# EAGLE board Board-TSC (EAGLE 9.7.0)
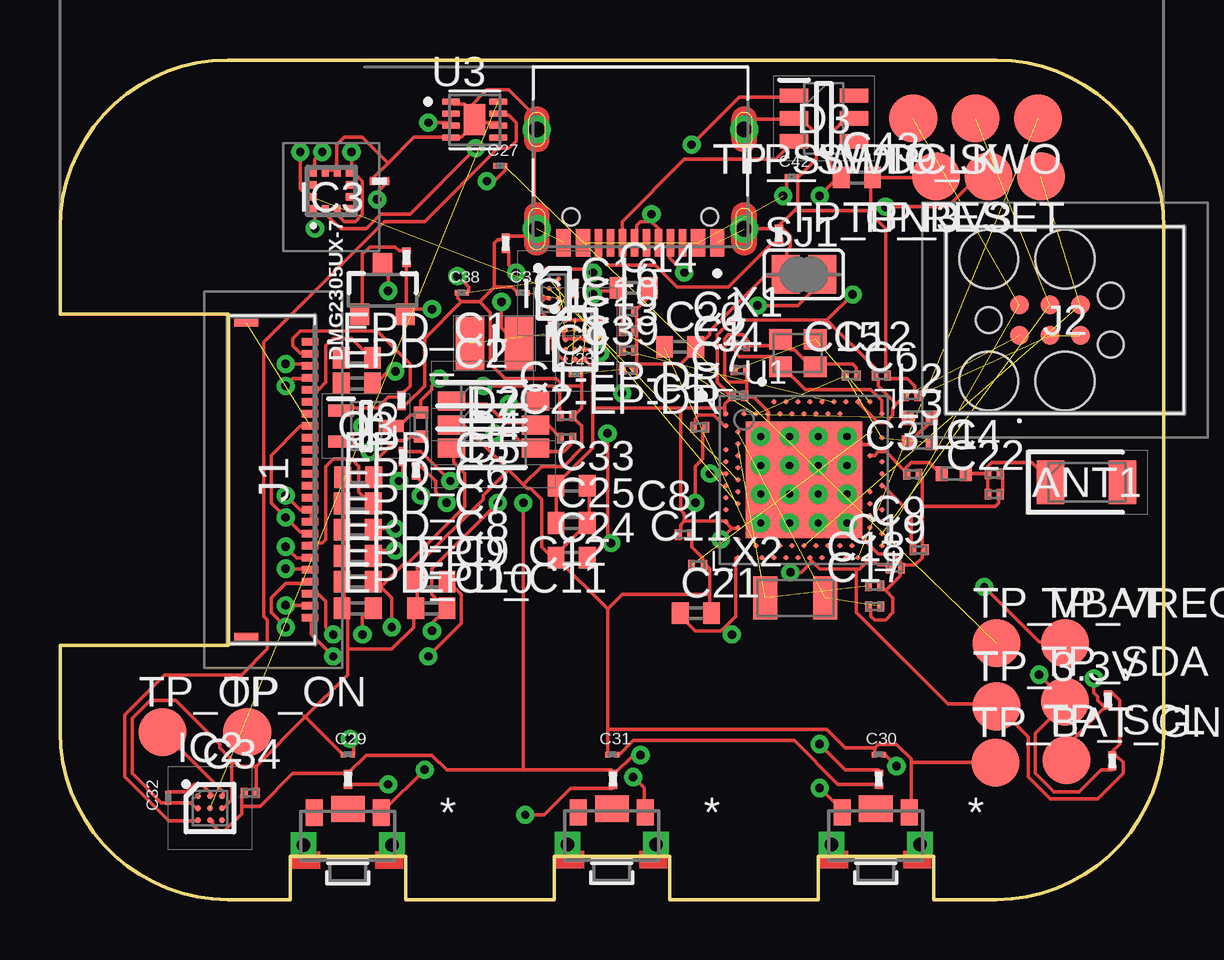
[diagram p0: board, top side]
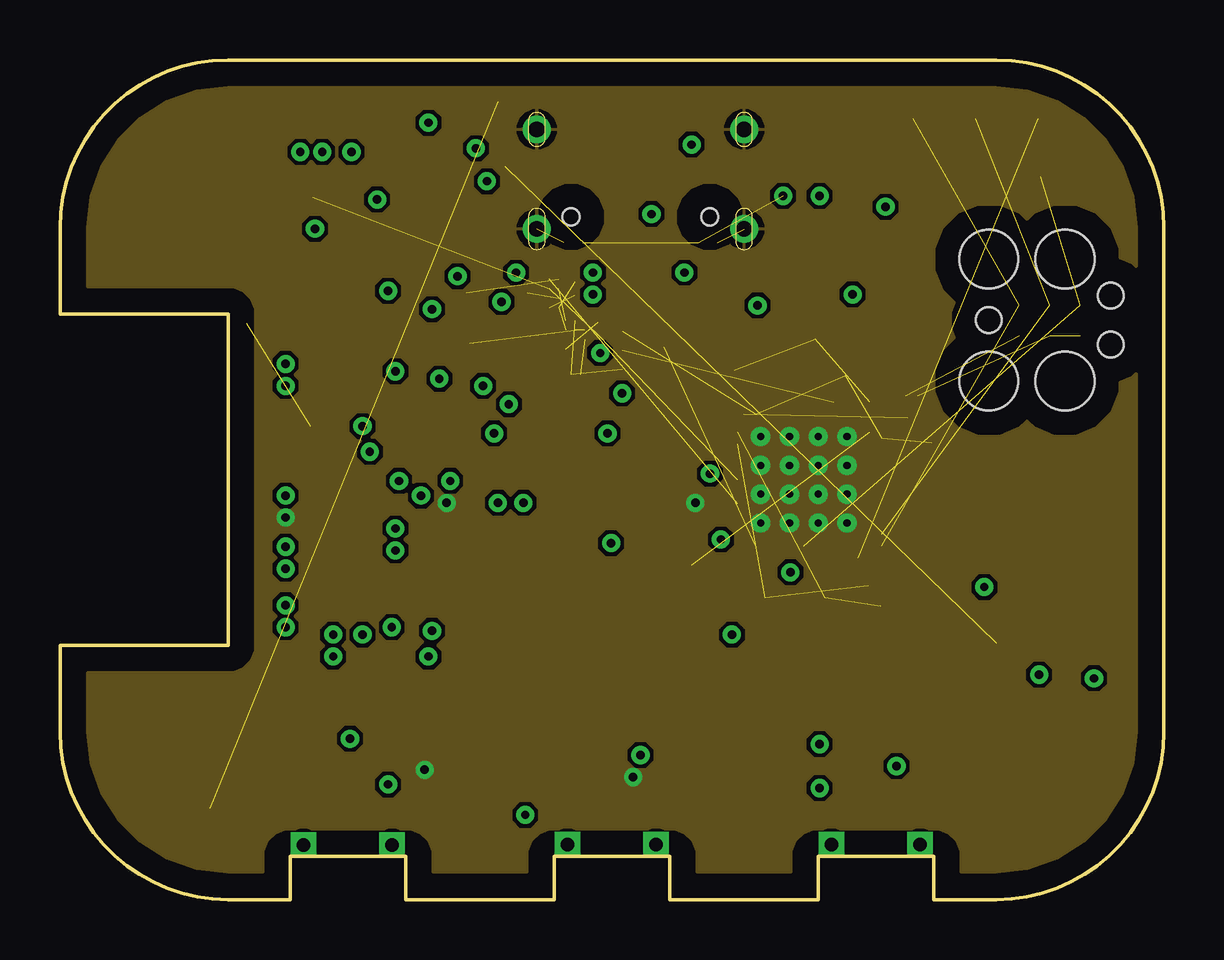
[diagram p1: board, inner layer Route2]
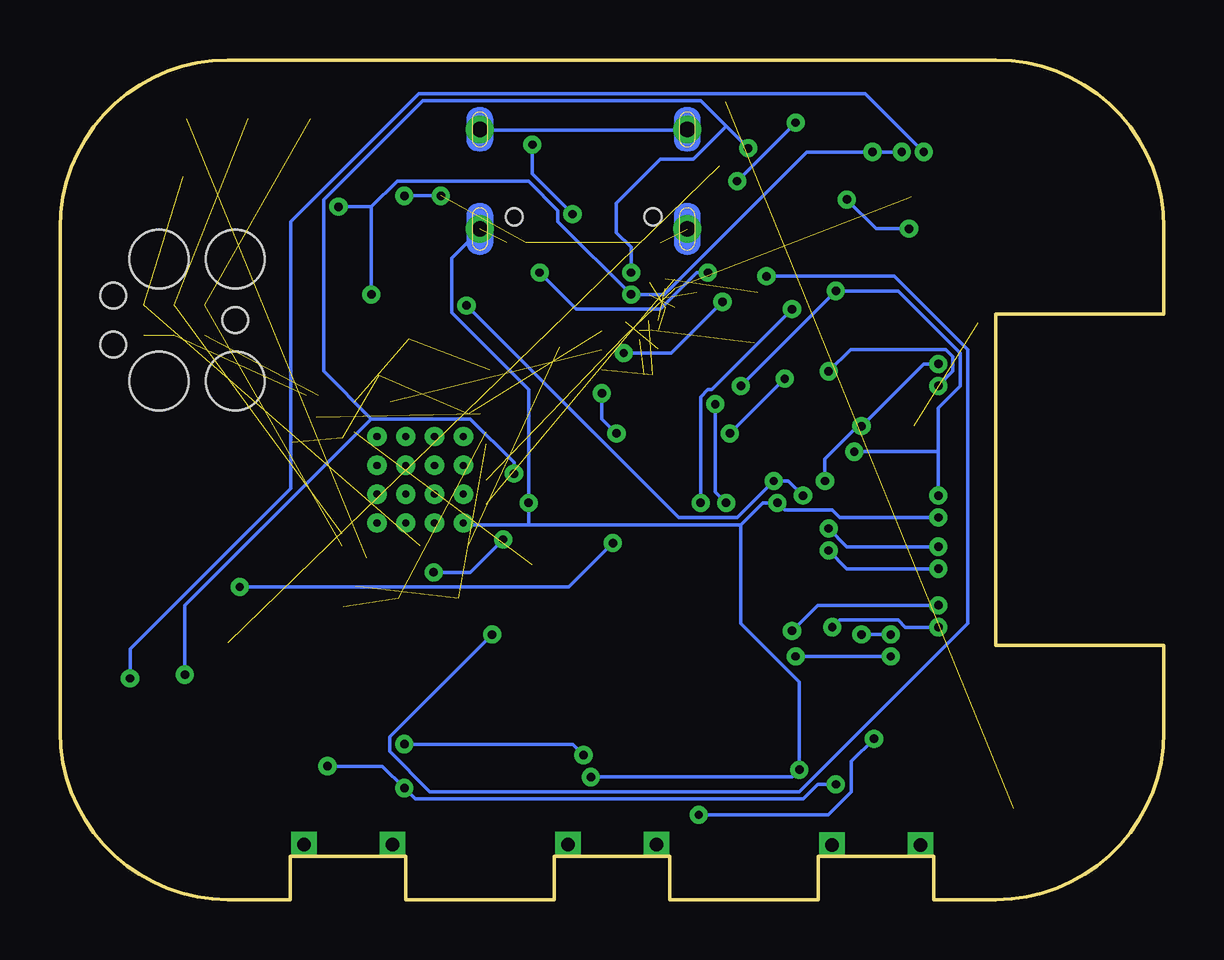
[diagram p2: board, bottom side, seen from below]

Size 46 x 35 mm. Coordinates in mm from the lower left corner, seen from the top.
Outline: 39,0 36.4,0 36.4,1.8 31.6,1.8 31.6,0 25.4,0 25.4,1.8 20.6,1.8 20.6,0 14.4,0 14.4,1.8 9.6,1.8 9.6,0 7,0 arc-90 0,7 0,10.6 7,10.6 7,24.4 0,24.4 0,28 arc-90 7,35 39,35 arc-90 46,28 46,7 arc-90 39,0
Copper layers (1+2*15+16): Top / Route2 / Route63 / Bottom
Stack-up 4 Layer Stack: Top SilkScreen Epoxy Ink / Top SolderMask SR:Green 0.0254mm Dk 4.3 / Top Surface Finish Lead-Free 0.02mm / Top CuFoil:007 0.035mm / Dielectric-1 Prepreg:001 0.064mm / Dielectric-2 Prepreg:001 0.064mm / Route2 CuFoil:007 0.035mm / Dielectric-3 Core:066 0.711mm / Route63 CuFoil:007 0.035mm / Dielectric-4 Prepreg:001 0.064mm / Dielectric-5 Prepreg:001 0.064mm / Bottom CuFoil:007 0.035mm / Bottom Surface Finish Lead-Free 0.02mm / Bottom SolderMask SR:Green 0.0254mm Dk 4.3 / Bottom SilkScreen Epoxy Ink
Design rules: minimum copper width 6mil, minimum drill size 0.35mm, copper clearance wire_polygon to wire_polygon 6mil, copper clearance wire_polygon to pad_smd 6mil, copper clearance wire_polygon to via 6mil, copper clearance pad_smd to pad_smd 6mil, copper clearance pad_smd to via 6mil, copper clearance via to via 6mil, copper clearance smd to pad (same net) 6mil, copper clearance smd to via (same net) 6mil, copper clearance smd to smd (same net) 6mil, dimension clearance 40mil, via restrict clearance 0mil, restrict clearance 0mil, drill distance 6mil, keepout clearance 0mil

## Footprints (pad centres in the part's own frame; a part is rotated, then mirrored left to right if it is on the bottom)
2450AT18B100E_ANTC3216X140N = smd 1.15 x 1.8: 1 -1.5,0; 2 1.5,0
NORDIC_NRF_3_RESC0201_L = smd 0.28 x 0.43: 1 -0.255,0; 2 0.255,0
ESP32_C6_LIBRARY_1_ESP32_WROVER_EAGLE-LTSPICE_C0402 = smd 0.7 x 0.9: 1 -0.65,0; 2 0.65,0
GRM011R60J152KE01L_2_CAPC0201X13N = smd 0.22 x 0.23: 1 -0.185,0; 2 0.185,0
ESP32_C6_LIBRARY_5_SOD3716X135N = smd 1.15 x 0.8: 1 -1.75,0; 2 1.75,0
ESP32_C6_LIBRARY_3_SOT95P280X145-6N = smd 1.2 x 0.6: 1 -1.25,0.95; 2 -1.25,0; 3 -1.25,-0.95; 4 1.25,-0.95; 5 1.25,0; 6 1.25,0.95
ESP32_C6_LIBRARY_4_ESP32_C6_LIBRARY_4_ESP32_C6_LIBRARY_4_ESP32_C6_LIBRARY_4_ESP32_WROVER_SPARKFUN-DISCRETESEMI_SOT23-3 = smd 0.8 x 0.9: 1 -0.95,-1; 2 0.95,-1; 3 0,1.1
BQ25180YBGR_BGA8C40P2X4_100X155X50 = smd 0.2 x 0.2: A1 -0.2,0.6; A2 0.2,0.6; B1 -0.2,0.2; B2 0.2,0.2; C1 -0.2,-0.2; C2 0.2,-0.2; D1 -0.2,-0.6; D2 0.2,-0.6
DRV2605YZFR_BGA9C50P3X3_144X144X62 = smd 0.25 x 0.25: A1 -0.5,0.5; A2 0,0.5; A3 0.5,0.5; B1 -0.5,0; B2 0,0; B3 0.5,0; C1 -0.5,-0.5; C2 0,-0.5; C3 0.5,-0.5
BMA423_BMA423 = smd 0.3 x 0.35: 1 -0.75,-0.775; 2 -0.25,-0.775; 3 0.25,-0.775; 4 0.75,-0.775; 7 0.75,0.775; 8 0.25,0.775; 9 -0.25,0.775; 10 -0.75,0.775 | smd 0.35 x 0.3: 5 0.775,-0.25; 6 0.775,0.25; 11 -0.775,0.25; 12 -0.775,-0.25
RT6160AWSC_BGA15C40P3X5_140X230X60 = smd 0.216 x 0.216: A1 -0.4,0.8; A2 0,0.8; A3 0.4,0.8; B1 -0.4,0.4; B2 0,0.4; B3 0.4,0.4; C1 -0.4,0; C2 0,0; C3 0.4,0; D1 -0.4,-0.4; D2 0,-0.4; D3 0.4,-0.4; E1 -0.4,-0.8; E2 0,-0.8; E3 0.4,-0.8
503480-2400_5034802400 = smd 0.3 x 0.7: 1 -5.75,1.525; 2 -5.25,1.525; 3 -4.75,1.525; 4 -4.25,1.525; 5 -3.75,1.525; 6 -3.25,1.525; 7 -2.75,1.525; 8 -2.25,1.525; 9 -1.75,1.525; 10 -1.25,1.525; 11 -0.75,1.525; 12 -0.25,1.525; 13 0.25,1.525; 14 0.75,1.525; 15 1.25,1.525; 16 1.75,1.525; 17 2.25,1.525; 18 2.75,1.525; 19 3.25,1.525; 20 3.75,1.525; 21 4.25,1.525; 22 4.75,1.525; 23 5.25,1.525; 24 5.75,1.525 | smd 0.3 x 1: MP1 -6.54,-1.125; MP2 6.54,-1.125
TC2030-IDC_TC2030IDC = smd 0.783 x 0.783: 1 -0.953,-0.635; 2 -0.953,0.635; 3 0.317,-0.635; 4 0.317,0.635; 5 1.588,-0.635; 6 1.588,0.635 | hole 2.451: -2.223,-2.54; -2.223,2.54; 0.952,-2.54; 0.952,2.54 | hole 1.067: -2.223,0; 2.857,-1.016; 2.857,1.016
KH-TYPE-C-16P_KINGHELM_KH-TYPE-C-16P = smd 0.6 x 1.15: A1_B12 -3.2,4.725; A4_B9 -2.4,4.725; A9_B4 2.4,4.725; A12_B1 3.2,4.725 | smd 0.3 x 1.15: A5 -1.25,4.725; A6 -0.25,4.725; A7 0.25,4.725; A8 1.25,4.725; B5 1.75,4.725; B6 0.75,4.725; B7 -0.75,4.725; B8 -1.75,4.725 | drill 0.65 pad 1.05: SH1 -4.32,0; SH2 4.32,0; SH3 -4.32,4.15; SH4 4.32,4.15 | hole 0.7: -2.89,3.65; 2.89,3.65
NORDIC_NRF_2_RESC0402_L = smd 0.5 x 0.6: 1 -0.5,0; 2 0.5,0
MLP2016SR47MT0S1_INDC2016X100N = smd 1.2 x 2.2: 1 -1.028,0; 2 1.028,0
ESP32_C6_LIBRARY_6_SOT65P210X110-3N = smd 1.05 x 0.5: 1 -1.05,0.65; 2 -1.05,-0.65; 3 1.05,0
ERA-1AEB3401C_0201 = smd 0.35 x 0.25: 1 0,0.275; 2 0,-0.275
CPF0201D7K68C1_0201 = smd 0.35 x 0.25: 1 0,0.275; 2 0,-0.275
ESP32_C6_LIBRARY_7_JUMPER_SJ = smd 1.168 x 1.6: 1 -0.762,0; 2 0.762,0
2025-10-22_07-23-44_LIBRARY_SW_EVP-AKE31A_PAN = smd 0.711 x 1.092: 1 -1.4,-0.972; 2 1.4,-0.972 | drill 0.559 pad 0.914 square: 3 -1.848,0.381; 4 1.848,0.381 | smd 1.397 x 1.092: 5 0,-1.124
HECTOR_WATCH_1_TP20R = smd 2 x 2: TP 0,0
NORDIC_NRF_4_AQFN50P700X700X85_HS-74N = smd 4.85 x 4.85: P$74 0,0 | drill 0.3 pad 0.6: P$75 -1.8,1.8; P$76 -0.6,1.8; P$77 0.6,1.8; P$78 1.8,1.8; P$79 -1.8,0.6; P$80 -0.6,0.6; P$81 0.6,0.6; P$82 1.8,0.6; P$83 -1.8,-0.6; P$84 -0.6,-0.6; P$85 0.6,-0.6; P$86 1.8,-0.6; P$87 -1.8,-1.8; P$88 -0.6,-1.8; P$89 0.6,-1.8; P$90 1.8,-1.8 | smd 0.2 x 0.2: P$A8 -1.25,3.25; P$A10 -0.75,3.25; P$A12 -0.25,3.25; P$A14 0.25,3.25; P$A16 0.75,3.25; P$A18 1.25,3.25; P$A20 1.75,3.25; P$A22 2.25,3.25; P$A23 2.75,3.25; P$AA24 3.25,-2.25; P$AB2 -2.75,-2.5; P$AC5 -2,-2.75; P$AC9 -1,-2.75; P$AC11 -0.5,-2.75; P$AC13 0,-2.75; P$AC15 0.5,-2.75; P$AC17 1,-2.75; P$AC19 1.5,-2.75; P$AC21 2,-2.75; P$AC24 3.25,-2.75; P$AD2 -2.75,-3.25; P$AD4 -2.25,-3.25; P$AD6 -1.75,-3.25; P$AD8 -1.25,-3.25; P$AD10 -0.75,-3.25; P$AD12 -0.25,-3.25; P$AD14 0.25,-3.25; P$AD16 0.75,-3.25; P$AD18 1.25,-3.25; P$AD20 1.75,-3.25; P$AD22 2.25,-3.25; P$AD23 2.75,-3.25; P$B1 -3.25,2.75; P$B3 -2.5,2.75; P$B5 -2,2.75; P$B7 -1.5,2.75; P$B9 -1,2.75; P$B11 -0.5,2.75; P$B13 0,2.75; P$B15 0.5,2.75; P$B17 1,2.75; P$B19 1.5,2.75; P$B24 3.25,2.75; P$C1 -3.25,2.25; P$D2 -2.75,2; P$D23 2.75,2; P$E24 3.25,1.75; P$F2 -2.75,1.5; P$F23 2.75,1.5; P$G1 -3.25,1.25; P$H2 -2.75,1; P$H23 2.75,1; P$J1 -3.25,0.75; P$J24 3.25,0.75; P$K2 -2.75,0.5; P$L1 -3.25,0.25; P$L24 3.25,0.25; P$M2 -2.75,0; P$N1 -3.25,-0.25; P$N24 3.25,-0.25; P$P2 -2.75,-0.5; P$P23 2.75,-0.5; P$R1 -3.25,-0.75; P$R24 3.25,-0.75; P$T2 -2.75,-1; P$T23 2.75,-1; P$U1 -3.25,-1.25; P$U24 3.25,-1.25; P$V23 2.75,-1.5; P$W1 -3.25,-1.75; P$W24 3.25,-1.75; P$Y2 -2.75,-2; P$Y23 2.75,-2
ESP32_C6_LIBRARY_SON50P200X200X80-9N = smd 0.76 x 0.27: 1 -0.985,0.75; 2 -0.985,0.25; 3 -0.985,-0.25; 4 -0.985,-0.75; 5 0.985,-0.75; 6 0.985,-0.25; 7 0.985,0.25; 8 0.985,0.75 | smd 0.9 x 1.3: 9 0,0
NORDIC_NRF_BT-XTAL_2016_N = smd 0.95 x 0.85: 1 -0.725,-0.575; 2 0.725,-0.575; 3 0.725,0.575; 4 -0.725,0.575
NORDIC_NRF_1_XTAL_3215_N = smd 1 x 1.8: 1 -1.25,0; 2 1.25,0

## Placement (x,y rotation side)
ANT1  2450AT18B100E  [2450AT18B100E_ANTC3216X140N]  42.78,17.4 0 top
C1  12pF  [NORDIC_NRF_3_RESC0201_L]  28.35,23.09 0 top
C1-EP-DR  10uF  [NORDIC_NRF_3_RESC0201_L]  21.11,20.17 0 top
C2  12pF  [NORDIC_NRF_3_RESC0201_L]  28.35,22.07 0 top
C2-EP-DR  4.7uF/25V  [NORDIC_NRF_3_RESC0201_L]  21.11,19.23 0 top
C3  1pF  [NORDIC_NRF_3_RESC0201_L]  35.54,17.73 0 top
C4  1pF  [NORDIC_NRF_3_RESC0201_L]  38.92,17.75 0 top
C5  100nF  [NORDIC_NRF_3_RESC0201_L]  26.65,19.68 0 top
C6  4.7µF  [NORDIC_NRF_3_RESC0201_L]  35.49,21.01 0 top
C7  100nF  [NORDIC_NRF_3_RESC0201_L]  28.28,21.01 0 top
C8  100nF  [NORDIC_NRF_3_RESC0201_L]  26.01,15.21 0 top
C9  820pF  [NORDIC_NRF_3_RESC0201_L]  35.79,14.58 0 top
C10  N.C.  [NORDIC_NRF_3_RESC0201_L]  23.68,23.71 0 top
C11  100pF  [NORDIC_NRF_3_RESC0201_L]  26.57,13.94 0 top
C12  100nF  [NORDIC_NRF_3_RESC0201_L]  34.22,21.84 0 top
C13  N.C.  [NORDIC_NRF_3_RESC0201_L]  23.68,22.9 0 top
C14  4.7µF  [ESP32_C6_LIBRARY_1_ESP32_WROVER_EAGLE-LTSPICE_C0402]  23.91,25.5 0 top
C15  1.0µF  [NORDIC_NRF_3_RESC0201_L]  32.97,21.84 0 top
C16  47nF  [NORDIC_NRF_3_RESC0201_L]  23.68,24.51 0 top
C17  12pF  [NORDIC_NRF_3_RESC0201_L]  33.94,12.22 0 top
C18  12pF  [NORDIC_NRF_3_RESC0201_L]  33.94,13.08 0 top
C19  100nF  [NORDIC_NRF_3_RESC0201_L]  34.8,13.82 0 top
C20  4.7µF  [ESP32_C6_LIBRARY_1_ESP32_WROVER_EAGLE-LTSPICE_C0402]  25.84,23.04 0 top
C21  4.7µF  [ESP32_C6_LIBRARY_1_ESP32_WROVER_EAGLE-LTSPICE_C0402]  26.5,11.94 0 top
C22  N.C.  [NORDIC_NRF_3_RESC0201_L]  38.92,16.89 0 top
C23  0.1uF  [GRM011R60J152KE01L_2_CAPC0201X13N]  21.49,21.89 0 top
C24  10uF  [ESP32_C6_LIBRARY_1_ESP32_WROVER_EAGLE-LTSPICE_C0402]  21.32,14.25 0 top
C25  22uF  [ESP32_C6_LIBRARY_1_ESP32_WROVER_EAGLE-LTSPICE_C0402]  21.32,15.7 0 top
C27  0.1uF  [GRM011R60J152KE01L_2_CAPC0201X13N]  18.34,30.58 0 top
C29  1uF  [GRM011R60J152KE01L_2_CAPC0201X13N]  11.99,6.05 0 top
C30  1uF  [GRM011R60J152KE01L_2_CAPC0201X13N]  34.12,6.05 0 top
C31  1uF  [GRM011R60J152KE01L_2_CAPC0201X13N]  23.02,6.05 0 top
C32  1uF  [GRM011R60J152KE01L_2_CAPC0201X13N]  4.5,4.24 90 top
C33  22uF  [ESP32_C6_LIBRARY_1_ESP32_WROVER_EAGLE-LTSPICE_C0402]  21.32,17.25 0 top
C34  0.1uF  [NORDIC_NRF_3_RESC0201_L]  7.93,4.44 0 top
C37  1uF  [GRM011R60J152KE01L_2_CAPC0201X13N]  19.28,25.3 0 top
C38  1uF  [GRM011R60J152KE01L_2_CAPC0201X13N]  16.74,25.3 0 top
C39  10uF  [NORDIC_NRF_3_RESC0201_L]  23.68,22.1 0 top
C42  0.1uF  [GRM011R60J152KE01L_2_CAPC0201X13N]  30.48,30.12 0 top
C43  4.7uF  [ESP32_C6_LIBRARY_1_ESP32_WROVER_EAGLE-LTSPICE_C0402]  33.2,30.1 0 top
D2  ESP32_C6_LIBRARY_5_MBR0530  [ESP32_C6_LIBRARY_5_SOD3716X135N]  18.06,20.78 0 top
D3  USBLC6-2SC6Y  [ESP32_C6_LIBRARY_3_SOT95P280X145-6N]  31.83,32.56 0 top
D4  ESP32_C6_LIBRARY_5_MBR0530  [ESP32_C6_LIBRARY_5_SOD3716X135N]  18.06,19.79 0 top
D5  ESP32_C6_LIBRARY_5_MBR0530  [ESP32_C6_LIBRARY_5_SOD3716X135N]  18.06,18.82 0 top
DMG2305UX-7  20V/4.2A/52mΩ/1.4W  [ESP32_C6_LIBRARY_4_ESP32_C6_LIBRARY_4_ESP32_C6_LIBRARY_4_ESP32_C6_LIBRARY_4_ESP32_WROVER_SPARKFUN-DISCRETESEMI_SOT23-3]  13.44,25.4 0 top
EPD_C1  1uF/50V  [ESP32_C6_LIBRARY_1_ESP32_WROVER_EAGLE-LTSPICE_C0402]  12.37,22.58 0 top
EPD_C2  1uF/50V  [ESP32_C6_LIBRARY_1_ESP32_WROVER_EAGLE-LTSPICE_C0402]  12.37,21.51 0 top
EPD_C5  0.1uF/50V  [ESP32_C6_LIBRARY_1_ESP32_WROVER_EAGLE-LTSPICE_C0402]  12.43,17.6 0 top
EPD_C6  1uF/50V  [ESP32_C6_LIBRARY_1_ESP32_WROVER_EAGLE-LTSPICE_C0402]  12.4,16.51 0 top
EPD_C7  1uF/50V  [ESP32_C6_LIBRARY_1_ESP32_WROVER_EAGLE-LTSPICE_C0402]  12.4,15.42 0 top
EPD_C8  1uF/50V  [ESP32_C6_LIBRARY_1_ESP32_WROVER_EAGLE-LTSPICE_C0402]  12.4,14.33 0 top
EPD_C9  1uF/50V  [ESP32_C6_LIBRARY_1_ESP32_WROVER_EAGLE-LTSPICE_C0402]  12.4,13.26 0 top
EPD_C10  1uF/50V  [ESP32_C6_LIBRARY_1_ESP32_WROVER_EAGLE-LTSPICE_C0402]  12.4,12.14 0 top
EPD_C11  1uF/50V  [ESP32_C6_LIBRARY_1_ESP32_WROVER_EAGLE-LTSPICE_C0402]  15.47,12.14 0 top
EPD_C12  1uF/50V  [ESP32_C6_LIBRARY_1_ESP32_WROVER_EAGLE-LTSPICE_C0402]  15.47,13.26 0 top
IC1  BQ25180YBGR  [BQ25180YBGR_BGA8C40P2X4_100X155X50]  20.58,25.27 0 top
IC2  DRV2605YZFR  [DRV2605YZFR_BGA9C50P3X3_144X144X62]  6.25,3.81 0 top
IC3  BMA421  [BMA423_BMA423]  11.31,29.54 0 top
IC9  RT6160AWSC  [RT6160AWSC_BGA15C40P3X5_140X230X60]  21.47,23.34 0 top
J1  503480-2400  [503480-2400_5034802400]  8.89,17.5 270 top
J2  TC2030-IDC  [TC2030-IDC_TC2030IDC]  40.92,24.15 0 top
J4  KH-TYPE-C-16P  [KH-TYPE-C-16P_KINGHELM_KH-TYPE-C-16P]  24.19,32.11 180 top
L1  3.9nH  [NORDIC_NRF_2_RESC0402_L]  37.24,17.75 0 top
L2  10µH  [NORDIC_NRF_2_RESC0402_L]  35.82,20.09 0 top
L3  15nH  [NORDIC_NRF_2_RESC0402_L]  35.82,19.05 0 top
L5  68uH  [NORDIC_NRF_2_RESC0402_L]  15.04,19.81 90 top
L7  FTC252012SR47MBCA  [MLP2016SR47MT0S1_INDC2016X100N]  18.11,23.19 0 top
Q3  SI1308EDL-T1-GE3  [ESP32_C6_LIBRARY_6_SOT65P210X110-3N]  12.76,19.74 0 top
R1_EP_DR  0.47  [ERA-1AEB3401C_0201]  14.28,18.47 0 top
R1_USB  5K1  [CPF0201D7K68C1_0201]  18.57,27.36 0 top
R2  0  [CPF0201D7K68C1_0201]  20.5,23.77 0 top
R2_EP_DR  10K  [ERA-1AEB3401C_0201]  14.23,20.8 180 top
R2_USB  5K1  [ERA-1AEB3401C_0201]  29.95,27.74 180 top
R3  0  [ERA-1AEB3401C_0201]  13.31,29.95 90 top
R4  0  [CPF0201D7K68C1_0201]  22.43,23.8 180 top
R5  10k  [CPF0201D7K68C1_0201]  11.99,5.02 180 top
R7  10k  [CPF0201D7K68C1_0201]  23.04,5.02 180 top
R8  10k  [CPF0201D7K68C1_0201]  34.12,5.02 180 top
R9  10K  [ERA-1AEB3401C_0201]  21.44,25.46 0 top
R17  3K3  [CPF0201D7K68C1_0201]  43.67,8.32 0 top
R18  3K3  [CPF0201D7K68C1_0201]  43.85,5.78 0 top
R_PWR_EPD  10K  [CPF0201D7K68C1_0201]  14.43,26.77 0 top
R_TYPE_SEL  2.2  [ERA-1AEB3401C_0201]  14.84,17.91 0 top
SJ1  [ESP32_C6_LIBRARY_7_JUMPER_SJ]  30.99,26.06 0 top
SW_DN  2025-10-22_07-23-44_LIBRARY_EVP-AKE31ASW_EVP-AKE31A_PAN  [2025-10-22_07-23-44_LIBRARY_SW_EVP-AKE31A_PAN]  11.99,2.66 180 top
SW_ENT  2025-10-22_07-23-44_LIBRARY_EVP-AKE31ASW_EVP-AKE31A_PAN  [2025-10-22_07-23-44_LIBRARY_SW_EVP-AKE31A_PAN]  22.99,2.67 180 top
SW_UP  2025-10-22_07-23-44_LIBRARY_EVP-AKE31ASW_EVP-AKE31A_PAN  [2025-10-22_07-23-44_LIBRARY_SW_EVP-AKE31A_PAN]  33.99,2.67 180 top
TP_3.3V  HECTOR_WATCH_1_TPTP20R  [HECTOR_WATCH_1_TP20R]  39.02,8.05 0 top
TP_3V3  HECTOR_WATCH_1_TPTP20R  [HECTOR_WATCH_1_TP20R]  38.69,30.14 180 top
TP_BAT_GND  HECTOR_WATCH_1_TPTP20R  [HECTOR_WATCH_1_TP20R]  38.98,5.71 0 top
TP_GND  HECTOR_WATCH_1_TPTP20R  [HECTOR_WATCH_1_TP20R]  36.5,30.14 180 top
TP_ON  HECTOR_WATCH_1_TPTP20R  [HECTOR_WATCH_1_TP20R]  7.8,6.98 0 top
TP_OP  HECTOR_WATCH_1_TPTP20R  [HECTOR_WATCH_1_TP20R]  4.27,6.98 0 top
TP_RESET  HECTOR_WATCH_1_TPTP20R  [HECTOR_WATCH_1_TP20R]  40.87,30.14 180 top
TP_SCL  HECTOR_WATCH_1_TPTP20R  [HECTOR_WATCH_1_TP20R]  41.94,5.82 0 top
TP_SDA  HECTOR_WATCH_1_TPTP20R  [HECTOR_WATCH_1_TP20R]  41.88,8.25 0 top
TP_SWDCLK  HECTOR_WATCH_1_TPTP20R  [HECTOR_WATCH_1_TP20R]  38.15,32.56 180 top
TP_SWDIO  HECTOR_WATCH_1_TPTP20R  [HECTOR_WATCH_1_TP20R]  35.55,32.56 180 top
TP_SWO  HECTOR_WATCH_1_TPTP20R  [HECTOR_WATCH_1_TP20R]  40.75,32.56 180 top
TP_VBAT  HECTOR_WATCH_1_TPTP20R  [HECTOR_WATCH_1_TP20R]  39.02,10.69 0 top
TP_VREG  HECTOR_WATCH_1_TPTP20R  [HECTOR_WATCH_1_TP20R]  41.88,10.69 0 top
U1  NRF52840_QF  [NORDIC_NRF_4_AQFN50P700X700X85_HS-74N]  30.99,17.5 0 top
U3  MAX17048G+T10  [ESP32_C6_LIBRARY_SON50P200X200X80-9N]  17.28,32.51 0 top
X1  32MHz  [NORDIC_NRF_BT-XTAL_2016_N]  30.74,22.78 0 top
X2  32.768kHz  [NORDIC_NRF_1_XTAL_3215_N]  30.64,12.57 0 top

## Library data of the parts
ANT1 = InkTime_v5 (1); ARROW_PART_NUMBER: 2450AT18B100E; ARROW_PRICE-STOCK: https://www.arrow.com/en/products/2450at18b100e/johanson-dielectrics?utm_currency=USD&region=nac; DESCRIPTION: Antennas 2.45GHz ANTENNA; HEIGHT: 1.4mm; MANUFACTURER_NAME: JOHANSON TECHNOLOGY; MANUFACTURER_PART_NUMBER: 2450AT18B100E; MOUSER_PART_NUMBER: 609-2450AT18B100E; MOUSER_PRICE-STOCK: https://www.mouser.co.uk/ProductDetail/Johanson-Technology/2450AT18B100E?qs=yCnrNFeXz%252Bh5MFsFIXGZGA%3D%3D
C1 C1-EP-DR C2 C2-EP-DR C3-C13 C15-C19 C22 C34 C39 L1-L3 L5 R1_EP_DR R1_USB R2 R2_EP_DR R2_USB R3-R5 R7-R9 R17 R18 R_PWR_EPD R_TYPE_SEL SJ1 TP_3.3V TP_3V3 TP_BAT_GND TP_GND TP_ON TP_OP TP_RESET TP_SCL TP_SDA TP_SWDCLK TP_SWDIO TP_SWO TP_VBAT TP_VREG U1 X1 X2 = InkTime_v5 (1)
C14 C20 C21 C24 C25 C33 C43 EPD_C1 EPD_C2 EPD_C5-EPD_C12 = InkTime_v5 (1); SPICEMODEL: NONE; SPICEPREFIX: C
C23 C27 C29-C32 C37 C38 C42 = InkTime_v5 (1); AVAILABILITY: In Stock; CHECK_PRICES: https://www.snapeda.com/parts/GRM011R60J152KE01L/Murata/view-part/?ref=eda; DESCRIPTION: SMD Capacitor X5R(EIA) with Capacitance: 1500pF Tol. 10%. Rated Voltage: 6.3Vdc; MF: Murata; MP: GRM011R60J152KE01L; PACKAGE: 0201 Murata; PRICE: None; SNAPEDA_LINK: https://www.snapeda.com/parts/GRM011R60J152KE01L/Murata/view-part/?ref=snap
D2 D4 D5 = InkTime_v5 (1); AVAILABILITY: In Stock; CHECK_PRICES: https://www.snapeda.com/parts/MBR0530/Onsemi/view-part/?ref=eda; DESCRIPTION: Diode Schottky 30 V 500mA Surface Mount SOD-123; MF: ON Semiconductor; MP: MBR0530; PACKAGE: SOD-123-2 ON Semiconductor; PRICE: None; PURCHASE-URL: https://www.snapeda.com/api/url_track_click_mouser/?unipart_id=179458&manufacturer=ON Semiconductor&part_name=MBR0530&search_term=None; SNAPEDA_LINK: https://www.snapeda.com/parts/MBR0530/Onsemi/view-part/?ref=snap
D3 = InkTime_v5 (1); AVAILABILITY: In Stock; CHECK_PRICES: https://www.snapeda.com/parts/USBLC6-2SC6Y/STMicroelectronics/view-part/?ref=eda; DESCRIPTION: 17V Clamp 5A (8/20µs) Ipp Tvs Diode Surface Mount SOT-23-6; MF: STMicroelectronics; MP: USBLC6-2SC6Y; PACKAGE: SOT-23-6 STMicroelectronics; PRICE: None; SNAPEDA_LINK: https://www.snapeda.com/parts/USBLC6-2SC6Y/STMicroelectronics/view-part/?ref=snap
DMG2305UX-7 = InkTime_v5 (1); PROD_ID: TRAN-14388
IC1 = InkTime_v5 (1); ARROW_PART_NUMBER: BQ25180YBGR; ARROW_PRICE-STOCK: https://www.arrow.com/en/products/bq25180ybgr/texas-instruments?utm_currency=USD&region=nac; DESCRIPTION: Charger IC Lithium Ion/Polymer, Lithium Iron Phosphate 8-DSBGA (1.6x1.1); HEIGHT: 0.5mm; MANUFACTURER_NAME: Texas Instruments; MANUFACTURER_PART_NUMBER: BQ25180YBGR; MOUSER_PART_NUMBER: 595-BQ25180YBGR; MOUSER_PRICE-STOCK: https://www.mouser.co.uk/ProductDetail/Texas-Instruments/BQ25180YBGR?qs=doiCPypUmgEWjAK%252BJAX6Tw%3D%3D
IC2 = InkTime_v5 (1); ARROW_PART_NUMBER: DRV2605YZFR; ARROW_PRICE-STOCK: https://www.arrow.com/en/products/drv2605yzfr/texas-instruments?region=nac; DESCRIPTION: Haptic Driver for ERM/LRA with Built-In Library and Smart Loop Architecture; HEIGHT: 0.625mm; MANUFACTURER_NAME: Texas Instruments; MANUFACTURER_PART_NUMBER: DRV2605YZFR
IC3 = InkTime_v5 (1); ARROW_PART_NUMBER: BMA423; ARROW_PRICE-STOCK: https://www.arrow.com/en/products/bma423/bosch; DESCRIPTION: Accelerometers Triaxial low-g 12bit Acceleration Sensor; HEIGHT: 1mm; MANUFACTURER_NAME: BOSCH; MANUFACTURER_PART_NUMBER: BMA423; MOUSER_PART_NUMBER: 262-BMA423; MOUSER_PRICE-STOCK: https://www.mouser.co.uk/ProductDetail/Bosch-Sensortec/BMA423?qs=HXFqYaX1Q2xC%252BSgeGoX3mg%3D%3D
IC9 = InkTime_v5 (1); DESCRIPTION: Buck-Boost Regulator Positive Output Step-Up/Step-Down I2C DC-DC Controller IC 15-WL-CSP (BSC) (1.4x2.3); HEIGHT: 0.6mm; MANUFACTURER_NAME: RICHTEK; MANUFACTURER_PART_NUMBER: RT6160AWSC; MOUSER_PART_NUMBER: 835-RT6160AWSC; MOUSER_PRICE-STOCK: https://www.mouser.co.uk/ProductDetail/Richtek/RT6160AWSC?qs=amGC7iS6iy%2FLd9PSoixZXQ%3D%3D
J1 = InkTime_v5 (1); DESCRIPTION: FFC & FPC Connectors 0.5mm FPC RA SMT Dual Contact 24Ckt; HEIGHT: 1.87mm; MANUFACTURER_NAME: Molex; MANUFACTURER_PART_NUMBER: 503480-2400; MOUSER_PART_NUMBER: 538-503480-2400; MOUSER_PRICE-STOCK: https://www.mouser.co.uk/ProductDetail/Molex/503480-2400?qs=OAhjpuo3Vu7efIoxFh9AOw%3D%3D
J2 = InkTime_v5 (1); DESCRIPTION: CABLE ADAPTER 6 POS; HEIGHT: 19mm; MANUFACTURER_NAME: Tag Connect; MANUFACTURER_PART_NUMBER: TC2030-IDC
J4 = InkTime_v5 (1); AVAILABILITY: Not in stock; CHECK_PRICES: https://www.snapeda.com/parts/KH-TYPE-C-16P/Kinghelm/view-part/?ref=eda; MF: kinghelm; MP: KH-TYPE-C-16P; PACKAGE: None; PRICE: None; SNAPEDA_LINK: https://www.snapeda.com/parts/KH-TYPE-C-16P/Kinghelm/view-part/?ref=snap
L7 = InkTime_v5 (1); DESCRIPTION: SMD / SMT Inductors (Coils), L=0.47?H, L x W x T :; HEIGHT: 1mm; JLCPCB: https://jlcpcb.com/partdetail/6763488-FTC252012SR47MBCA/C5832368; MANUFACTURER_NAME: TDK; MANUFACTURER_PART_NUMBER: FTC252012SR47MBCA
Q3 = InkTime_v5 (1); AVAILABILITY: In Stock; CHECK_PRICES: https://www.snapeda.com/parts/SI1308EDL-T1-GE3/Vishay+Siliconix/view-part/?ref=eda; DESCRIPTION: Si1308EDL-T1-GE3 N-channel MOSFET Transistor, 1.5 A, 30 V, 3-Pin SC-70 | Siliconix / Vishay SI1308EDL-T1-GE3; MF: Vishay Siliconix; MP: SI1308EDL-T1-GE3; PACKAGE: SOT-323 Vishay Semiconductor; PRICE: None; PURCHASE-URL: https://www.snapeda.com/api/url_track_click_mouser/?unipart_id=274603&manufacturer=Vishay Siliconix&part_name=SI1308EDL-T1-GE3&search_term=None; SNAPEDA_LINK: https://www.snapeda.com/parts/SI1308EDL-T1-GE3/Vishay+Siliconix/view-part/?ref=snap
SW_DN SW_ENT SW_UP = InkTime_v5 (1); COPYRIGHT: Copyright (C) 2025 Ultra Librarian. All rights reserved.; DIGI-KEY_PART_NUMBER_1: P123437TR-ND; DIGI-KEY_PART_NUMBER_2: P123437CT-ND; DIGI-KEY_PART_NUMBER_3: P123437DKR-ND; MANUFACTURER_NAME: Panasonic; MANUFACTURER_PART_NUMBER: EVP-AKE31A
U3 = InkTime_v5 (1); AVAILABILITY: In Stock; CHECK_PRICES: https://www.snapeda.com/parts/MAX17048G+T10/Analog+Devices/view-part/?ref=eda; DESCRIPTION: 3µA 1-Cell/2-Cell Fuel Gauge with ModelGauge; MF: Analog Devices; MP: MAX17048G+T10; PACKAGE: TDFN-8 Maxim; PRICE: None; PURCHASE-URL: https://www.snapeda.com/api/url_track_click_mouser/?unipart_id=329239&manufacturer=Analog Devices&part_name=MAX17048G+T10&search_term=None; SNAPEDA_LINK: https://www.snapeda.com/parts/MAX17048G+T10/Analog+Devices/view-part/?ref=snap

## Nets
3V3/1.7D: C34.1 DMG2305UX-7.2 IC2.C2 R5.2 R7.2 R8.2 R_PWR_EPD.2
3V3/2.4A: C6.1 C7.1 C8.1 C12.1 C14.1 C19.1 C25.1 C33.1 IC3.3 IC3.7 IC3.10 IC9.E2 IC9.E3 J2.1 R17.1 R18.1 TP_3.3V.TP TP_3V3.TP U1.P$A22 U1.P$AD14 U1.P$AD23 U1.P$B1 U1.P$W1 U1.P$Y2
ALERT/1.6C: U3.5
ALERT/2.5C: U1.P$J24
D+/1.5D: D3.4
D+/2.7D: U1.P$AD6
D-/1.5D: D3.6
D-/2.7D: U1.P$AD4
DN: D3.1 J4.A7 J4.B7
DP: D3.3 J4.A6 J4.B6
EPD_3V3: C1-EP-DR.1 DMG2305UX-7.3 EPD_C5.2 J1.15 J1.16 L5.1
EPD_BUSY/1.5D: J1.9
EPD_BUSY/2.2D: U1.P$AD12
EPD_CS/1.4C: J1.12
EPD_CS/2.2D: U1.P$K2
EPD_DC/1.5D: J1.11
EPD_DC/2.2D: U1.P$AD10
EPD_RST/1.5D: J1.10
EPD_RST/2.2D: U1.P$AC11
GDR: J1.2 Q3.1 R2_EP_DR.2
GND: C1-EP-DR.2 C1.2 C2.2 C3.2 C4.2 C5.2 C6.2 C7.2 C8.2 C9.2 C10.2 C11.2 C12.2 C13.2 C14.2 C15.2 C16.2 C17.1 C18.2 C19.2 C20.2 C21.2 C22.2 C23.2 C24.1 C25.2 C29.1 C30.1 C31.1 C32.1 C33.2 C34.2 C37.1 C38.1 C39.2 C42.2 C43.2 D3.2 D4.1 EPD_C5.1 EPD_C6.1 EPD_C7.1 EPD_C8.1 EPD_C9.1 EPD_C10.1 EPD_C11.1 EPD_C12.1 IC1.D2 IC2.B1 IC2.B3 IC3.8 IC3.9 IC9.B1 IC9.C1 IC9.C2 IC9.C3 J1.8 J1.17 J1.MP1 J2.3 J2.5 J4.A1_B12 J4.A12_B1 J4.SH1 J4.SH2 J4.SH3 J4.SH4 R1_USB.1 R2_EP_DR.1 R2_USB.2 R3.1 R9.1 R_TYPE_SEL.1 SJ1.1 SW_DN.1 SW_ENT.1 SW_UP.1 TP_BAT_GND.TP TP_GND.TP U1.P$74 U1.P$75 U1.P$76 U1.P$77 U1.P$78 U1.P$79 U1.P$80 U1.P$81 U1.P$82 U1.P$83 U1.P$84 U1.P$85 U1.P$86 U1.P$87 U1.P$88 U1.P$89 U1.P$90 U1.P$B7 U1.P$F23 U3.1 U3.4 U3.6 U3.9 X1.2 X1.4
HAPTIC_EN/1.4C: IC2.A1
HAPTIC_EN/2.6A: U1.P$U1
IMU_INT1: U1.P$N1
IMU_INT2: U1.P$P2
JJ: C10.1 C15.1 C16.1 L3.2 U1.P$B5 U1.P$E24
LX1: IC9.B2 IC9.B3 L7.1
LX2: IC9.D2 IC9.D3 L7.2
MOSI/1.5B: J1.14
MOSI/2.2D: U1.P$B13
MU_INT1: IC3.5
MU_INT2: IC3.6
N$1: IC1.D1 R9.2
N$2: IC9.D1 R4.2
N$3: IC9.E1 R2.2
N$4: IC3.1 R3.2
N$5: C20.1 U1.P$AC5
N$6: C18.1 U1.P$F2 X2.1
N$7: C17.2 U1.P$D2 X2.2
N$8: C5.1 U1.P$C1
N$9: C9.1 U1.P$N24
N$10: L2.1 U1.P$B3
N$11: L2.2 L3.1
N$12: C3.1 L1.1 U1.P$H23
N$13: ANT1.1 C4.1 C22.1 L1.2
N$14: C11.1 U1.P$D23
N$15: C2.1 U1.P$A23 X1.3
N$16: C1.1 U1.P$B24 X1.1
N$17: C2-EP-DR.2 D5.2 L5.2 Q3.3
N$18: C2-EP-DR.1 D2.1 D4.2
N$20: R1_EP_DR.1 R_TYPE_SEL.2 SJ1.2
N$21: J1.MP2
N$22: C13.1 U1.P$A18
N$23: C32.2 IC2.A2
N$24: EPD_C2.2 J1.4
N$25: EPD_C1.2 J1.5
N$26: EPD_C2.1
N$27: EPD_C1.1
N$28: EPD_C6.2 J1.18
N$29: EPD_C7.2 J1.19
N$30: EPD_C8.2 J1.20
N$31: J4.A5 R1_USB.2
N$32: EPD_C10.2 J1.22
N$33: C31.2 R8.1
N$34: EPD_C12.2 J1.24
N$35: J4.B5 R2_USB.1
N$36: C29.2 R7.1
OUT: IC2.C3
OUT+: IC2.A3 TP_OP.TP
OUT-: TP_ON.TP
P0.04: U1.P$J1
P0.09: U1.P$L24
P0.13/1.5D: C30.2 R5.1 SW_UP.2
P0.13/2.6C: U1.P$AD8
P0.14/1.5D: SW_ENT.2
P0.14/2.7C: U1.P$AC9
P0.19: U1.P$AC15
P0.20: U1.P$AD16
P0.21: U1.P$AC17
P0.22: U1.P$AD18
P0.23: U1.P$AC19
P0.24: U1.P$AD20
P0.25: U1.P$AC21
P0.26: U1.P$G1
P0.27: U1.P$H2
P0.28: U1.P$B11
P0.29: U1.P$A10
P0.30: U1.P$B9
P0.31: U1.P$A8
P1.01/1.6C: DMG2305UX-7.1 R_PWR_EPD.1
P1.01/2.4B: U1.P$Y23
P1.02/1.6C: SW_DN.2
P1.02/2.8C: U1.P$W24
P1.03: U1.P$V23
P1.04: U1.P$U24
P1.05: U1.P$T23
P1.06: U1.P$R24
P1.07: U1.P$P23
P1.09: U1.P$R1
P1.10: U1.P$A20
P1.11: U1.P$B19
P1.12: U1.P$B17
P1.13: U1.P$A16
P1.14: U1.P$B15
P1.15: U1.P$A14
PMIC_INT: IC1.A1 U1.P$T2
PREVGH: D5.1 EPD_C9.2 J1.21
PREVGL: D2.2 EPD_C11.2 J1.23
RESE: J1.3 Q3.2 R1_EP_DR.2
RESET: J2.6 TP_RESET.TP U1.P$AC13
SCK/1.5B: J1.13
SCK/2.2D: U1.P$A12
SCL/1.4C: IC2.C1 U3.7
SCL/2.4C: IC1.B1 IC3.12 R4.1 R17.2 TP_SCL.TP U1.P$M2
SDA/1.4C: IC2.B2 U3.8
SDA/2.4C: IC1.C1 IC3.2 R2.1 R18.2 TP_SDA.TP U1.P$L1
SWDCLK: J2.4 TP_SWDCLK.TP U1.P$AA24
SWDIO: J2.2 TP_SWDIO.TP U1.P$AC24
SWO: TP_SWO.TP U1.P$AD22
VBAT/1.2A: C27.2 TP_VBAT.TP U3.2 U3.3
VBAT/2.5C: C37.2 IC1.C2
VBUS/1.5D: C42.1 C43.1 D3.5 J4.A4_B9 J4.A9_B4
VBUS/2.6D: C21.1 C38.2 IC1.A2 U1.P$AD2
VREG: C23.1 C24.2 C39.1 IC1.B2 IC9.A1 IC9.A2 IC9.A3 TP_VREG.TP

## Tracks (layer width: path | path; a pad name or v marks a point on that pad's centre or on a via)
3V3/1.7D  (via drill 0.35)
  Top 0.152: 14.43,24.61 14.43,24.46 DMG2305UX-7.2 14.43,24.61 | 14.43,24.61 R_PWR_EPD.2 | 7.57,3.89 7.57,4.34 C34.1 | 7.57,3.89 7.57,3.58 6.81,2.82 6.66,2.82 6.36,3.12 6.36,3.28 IC2.C2 | 11.99,5.26 9.71,5.26 8.34,3.89 7.57,3.89 | 19.31,5.41 16.11,5.41 15.5,6.02 12.76,6.02 11.99,5.26 | 19.31,5.41 22.97,5.41 R7.2 23.12,5.26 23.88,6.02 v24.19,6.02 | 11.99,5.26 R5.2 | v31.65,6.48 32.72,5.41 34.09,5.41 R8.2 | v15.5,24.61 14.43,24.61 | 19.31,5.41 v19.31,16.54
  Bottom 0.152: v31.65,6.48 24.64,6.48 v24.19,6.02 | v15.5,24.61 18.85,21.26 19,21.26 19.31,20.95 v19.31,16.54
3V3/2.4A  (via drill 0.35)  (1 unrouted)
  Top 0.152: 12.15,30.4 12.6,29.95 12.6,28.57 12.3,28.27 11.84,28.27 11.54,28.57 11.54,28.73 IC3.3 | v10.93,31.17 10.62,30.86 10.62,30.4 IC3.10 | 12.15,30.4 v12.15,31.17 | 12.15,30.4 IC3.7 | v22.2,25.22 22.36,25.37 23.12,25.37 C14.1 | v34.4,28.88 36.99,28.88 38.21,30.1 38.66,30.1 TP_3V3.TP | 31.35,14.1 31.65,13.79 33.18,13.79 | 31.35,14.1 31.2,14.25 U1.P$AD14 | 33.18,13.79 33.33,13.79 33.79,14.25 | 33.79,14.25 34.09,13.94 34.55,13.94 C19.1 | 33.79,14.25 U1.P$AD23 | R17.1 43.69,8.61 43.85,8.61 44.15,8.31 44.15,6.48 43.85,6.17 R18.1 43.85,6.02 44,6.02 44.3,5.71 44.3,5.26 43.24,4.19 41.25,4.19 40.34,5.11 40.34,6.78 39.12,8 TP_3.3V.TP 38.97,8.15 36.99,8.15 33.18,11.96 33.18,13.79 | 34.85,20.65 35.16,20.95 C6.1 | 34.85,20.65 34.7,20.5 34.7,20.19 34.4,19.89 34.09,19.89 33.33,20.65 33.33,20.8 U1.P$A22 | 34.85,20.65 34.09,21.41 34.09,21.72 C12.1 33.94,21.87 33.94,22.17 31.96,24.16 | 28,15.47 27.69,15.77 | 28,15.47 28.15,15.47 U1.P$Y2 | 26.01,15.77 25.86,15.62 25.86,15.32 C8.1 | 27.69,15.77 26.01,15.77 | 27.69,15.77 U1.P$W1 | 27.69,20.5 27.69,20.65 28,20.95 | 27.69,20.5 27.69,20.19 U1.P$B1 | 21.9,22.48 21.44,22.48 IC9.E2 | 21.9,22.48 22.2,22.17 22.2,20.5 | 22.2,20.5 22.2,18.82 20.68,17.3 C33.1 20.68,17.14 20.68,15.77 C25.1 | 21.9,22.48 IC9.E3 | 22.2,20.5 25.86,20.5 | 25.86,20.5 27.69,20.5 | 26.01,15.77 26.01,16.08 25.86,16.23 25.86,20.5 | 31.96,24.16 28,24.16 27.39,23.55 27.39,21.56 28,20.95 | 28,20.95 C7.1 | 31.35,14.1 30.89,13.64 v30.43,13.64 | 28,15.47 v27.54,15.01 | 31.96,24.16 v33.03,25.22
  Bottom 0.152: v10.93,31.17 v12.15,31.17 14.89,31.17 20.83,25.22 v22.2,25.22 25.25,28.27 25.25,28.73 26.47,29.95 31.96,29.95 33.03,28.88 | 33.03,28.88 v34.4,28.88 | v30.43,13.64 28.91,13.64 v27.54,15.01 | v33.03,25.22 33.03,28.88
DN  (via drill 0.35)
  Top 0.152: 24.64,28.27 24.19,28.27 24.03,28.12 24.03,27.51 J4.A7 | 24.64,28.27 24.95,27.97 24.95,27.51 J4.B7 | v26.32,31.47 28.3,33.45 30.43,33.45 D3.1 | 24.64,28.27 v24.64,28.57
  Bottom 0.152: v26.32,31.47 26.32,30.25 v24.64,28.57
DP  (1 unrouted)
  Top 0.152: J4.B6 23.42,27.51 23.42,28.27 26.01,30.86 29.82,30.86 30.43,31.47 D3.3
EPD_3V3  (via drill 0.35)
  Top 0.152: 13.21,18.36 13.97,19.13 14.43,19.13 14.58,19.28 15.04,19.28 L5.1 | 13.21,18.36 13.21,17.6 EPD_C5.2 | J1.16 10.47,15.77 10.47,16.23 J1.15 10.32,16.23 10.01,16.23 v9.4,16.84 | v17.63,21.41 20.53,21.41 20.83,21.11 20.83,20.19 C1-EP-DR.1 | v13.67,25.37 13.67,26.29 13.52,26.44 DMG2305UX-7.3 | v12.91,18.67 13.21,18.36
  Bottom 0.152: v17.63,21.41 v13.67,25.37 11.08,25.37 8.49,22.78 8.49,21.41 9.4,20.5 9.4,18.67 | 9.4,18.67 v9.4,16.84 | 9.4,18.67 v12.91,18.67
GDR
  Top 0.152: Q3.1 11.84,20.5 13.21,20.5 13.67,20.95 14.13,20.95 R2_EP_DR.2 14.28,21.11 14.58,21.41 14.58,22.33 13.21,23.7 10.01,23.7 9.71,23.39 9.71,23.09 10.01,22.78 10.32,22.78 J1.2
GND  (via drill 0.35)  (8 unrouted)
  Top 0.152: C4.2 39.27,17.75 39.27,16.99 C22.2 39.12,16.84 39.12,16.54 38.97,16.38 35.92,16.38 | 34.4,12.88 34.24,13.03 C18.2 | 34.4,12.88 34.7,12.57 34.7,11.96 34.4,11.66 33.94,11.66 33.79,11.81 33.79,12.12 C17.1 | 34.4,12.88 35.01,13.49 35.01,13.79 C19.2 | C19.2 35.16,13.94 35.62,13.94 35.92,14.25 35.92,14.55 C9.2 35.92,14.71 35.92,16.38 | 35.92,16.38 35.92,17.6 C3.2 | C15.2 33.18,21.87 33.18,22.17 33.03,22.33 31.5,22.33 X1.2 31.35,22.17 30.59,22.94 30.43,22.94 30.13,23.24 X1.4 29.98,23.24 29.82,23.09 C1.2 28.61,23.39 28.45,23.55 27.84,23.55 27.69,23.39 27.69,21.72 27.84,21.56 28.61,21.56 | 28.61,21.56 28.61,22.02 C2.2 | 28.61,21.56 28.61,21.11 C7.2 28.61,20.95 28.91,20.95 29.52,20.35 U1.P$B7 29.52,20.19 29.52,19.74 29.22,19.43 | 32.87,19.28 33.18,18.97 33.79,18.97 U1.P$F23 | 30.43,16.84 30.43,15.77 U1.P$88 | U1.P$89 31.65,15.77 31.65,16.84 U1.P$85 U1.P$74 | 29.22,18.06 29.22,16.99 U1.P$83 29.22,16.84 29.22,15.77 U1.P$87 | 29.22,18.06 U1.P$79 | 29.22,18.06 U1.P$74 | 30.43,16.84 U1.P$84 | 30.43,16.84 U1.P$74 | U1.P$80 30.43,18.21 U1.P$74 | U1.P$81 31.65,18.21 U1.P$74 | 32.87,16.84 32.87,15.77 U1.P$90 34.09,14.4 34.7,14.4 35.01,14.1 35.01,13.94 C19.2 | 32.87,16.84 U1.P$86 | 32.87,16.84 U1.P$74 | 32.26,18.67 32.72,18.21 U1.P$82 | 29.22,19.43 U1.P$75 | 29.22,19.43 U1.P$74 | U1.P$76 30.28,19.28 29.82,18.82 U1.P$74 | 32.26,18.67 31.65,19.28 U1.P$77 | 32.26,18.67 U1.P$74 | 32.87,19.28 U1.P$78 | 32.87,19.28 U1.P$74 | J1.17 10.32,15.32 10.01,15.32 v9.4,15.93 8.79,16.54 8.79,18.52 10.01,19.74 10.32,19.74 J1.8 | v16.11,16.54 15.65,16.99 15.65,17.45 15.04,18.06 14.89,18.06 R_TYPE_SEL.1 | v26.47,16.54 26.47,18.06 26.78,18.36 26.78,19.58 C5.2
  Top 0.152: v15.19,5.41 13.52,3.73 SW_DN.1 | v23.88,5.11 24.34,4.65 24.34,3.73 SW_ENT.1 | EPD_C5.1 11.84,17.6 11.84,16.54 EPD_C6.1 11.84,16.38 11.84,15.47 EPD_C7.1 11.84,15.32 11.84,14.4 EPD_C8.1 11.84,14.25 11.84,13.33 EPD_C9.1 11.84,13.18 11.84,12.27 EPD_C10.1 11.84,12.12 11.99,11.96 11.99,10.44 | 4.53,4.04 5.44,4.04 5.75,3.73 IC2.B1 | 8.18,5.56 8.18,4.5 C34.2 | 10.23,7.61 11.99,9.37 11.99,10.44 | 10.23,7.61 8.18,5.56 | 4.53,4.04 4.22,4.04 3,5.26 3,7.54 3.76,8.31 4.83,8.31 6.66,6.48 6.66,6.32 7.2,5.79 | 7.2,5.79 7.42,5.56 8.18,5.56 | 4.53,4.04 C32.1 | 11.99,10.44 13.82,10.44 14.74,11.35 14.74,12.12 EPD_C11.1 14.89,12.27 14.89,13.18 EPD_C12.1 14.89,13.33 14.89,13.94 17.63,16.69 17.63,16.84 18.7,17.91 | C6.2 35.62,21.11 35.62,21.41 35.31,21.72 34.55,21.72 C12.2 34.4,21.87 34.4,27.97 33.79,28.57 33.79,28.73 | TP_GND.TP 36.38,30.1 C43.2 33.79,30.1 33.79,28.73 | 24.03,22.33 24.03,22.78 C13.2 24.03,22.94 24.03,23.7 C10.2 24.03,23.85 24.03,24.46 C16.2 24.03,24.61 24.49,25.07 24.49,25.37 C14.2 | 24.03,22.33 24.03,22.17 C39.2 | 24.03,22.33 25.86,22.33 26.47,22.94 C20.2 26.62,23.09 27.08,23.55 27.08,23.7 29.37,25.98 30.13,25.98 SJ1.1 30.28,26.14 30.28,27.05 30.43,27.2 30.43,27.66 29.98,28.12 | J4.SH1 28.61,32.23 28.91,32.54 30.43,32.54 D3.2 30.59,32.54 30.89,32.54 31.5,31.93 31.5,30.86 30.74,30.1 | 30.74,30.1 30.74,28.88 30.59,28.73 | 29.98,28.12 30.59,28.73 | J4.SH3 28.61,27.97 29.82,27.97 R2_USB.2 29.98,28.12 | 30.74,30.1 C42.2 | 30.59,28.73 33.79,28.73 | 17.02,32.99 17.17,32.84 17.17,32.54 U3.9 | 17.02,32.99 16.87,33.15 16.41,33.15 U3.1 | U3.6 18.24,32.38 17.33,32.38 U3.9
  Top 0.152: 11.54,30.4 11.08,30.4 IC3.9 | 13.67,30.71 14.74,31.78 16.26,31.78 U3.4 16.41,31.78 16.72,31.78 17.17,32.23 17.17,32.38 U3.9 | 13.67,30.71 13.06,30.1 13.06,29.95 R3.1 | 11.54,30.4 11.54,31.47 11.84,31.78 12.6,31.78 13.67,30.71 | 11.54,30.4 IC3.8 | 21.75,21.41 21.75,20.5 21.44,20.19 C1-EP-DR.2 21.44,20.04 21.75,19.74 21.75,18.82 20.98,18.06 20.07,18.06 19.31,17.3 | 21.75,21.41 21.75,21.87 C23.2 | 16.72,24.92 16.57,25.07 16.57,25.22 C38.1 | 17.48,24.92 16.72,24.92 | 18.09,25.53 17.48,24.92 | 18.09,25.53 18.85,25.53 19,25.37 C37.1 | 16.72,24.92 15.19,23.39 15.19,21.41 14.43,20.65 14.28,20.65 R2_EP_DR.1 | 18.09,25.53 18.09,27.36 18.24,27.51 18.55,27.51 R1_USB.1 18.7,27.66 19.61,27.66 19.77,27.81 J4.SH4 19.77,27.97 19.77,32.08 J4.SH2 19.77,32.23 19.77,32.69 18.7,33.76 17.78,33.76 17.02,32.99 | 21.75,21.41 20.98,21.41 20.68,21.72 18.55,21.72 17.94,22.33 17.94,24.46 17.48,24.92 | 17.02,32.99 U3.9 | 33.94,6.32 33.94,6.02 C30.1 | 33.94,6.32 34.09,6.48 34.85,6.48 35.46,5.87 35.46,5.71 | 35.46,5.71 35.46,3.73 SW_UP.1 | 35.46,5.71 TP_BAT_GND.TP | C8.2 26.32,15.16 26.32,14.71 26.78,14.25 26.78,13.94 C11.2 26.93,13.94 27.08,13.79 27.08,12.73 | 27.08,12.73 27.08,11.96 C21.2 | C33.2 22.05,17.14 22.05,15.77 C25.2 21.9,15.62 20.53,14.25 | 22.81,12.12 22.81,7.09 | 22.81,7.09 22.81,6.02 C31.1 | 22.81,12.12 C24.1 20.53,14.25 | 19.31,17.3 19.46,17.14 19.61,17.14 20.07,16.69 20.07,14.71 20.53,14.25 | 19.31,17.3 18.7,17.91 | 18.7,17.91 16.87,19.74 16.41,19.74 D4.1 | 27.08,12.73 23.42,12.73 22.81,12.12 | 33.94,6.32 32.72,6.32 31.96,7.09 22.81,7.09 | 21.44,23.39 21.14,23.39 IC9.C1 20.98,23.39 20.98,23.7 IC9.B1
  Top 0.152: 21.44,23.39 21.9,23.39 IC9.C3 | 21.44,23.39 IC9.C2 | 10.23,7.61 11.77,6.07 C29.1 | 10.18,7.66 10.23,7.61 | IC2.B3 6.84,3.85 7.16,4.17 7.16,5.75 7.2,5.79
  Bottom 0.152: 17.63,15.62 16.72,16.54 v16.11,16.54 15.8,16.23 13.82,16.23 13.52,15.93 v9.4,15.93 | 26.47,15.62 29.06,15.62 U1.P$87 | 26.47,15.62 17.63,15.62 | 26.47,15.62 v26.47,16.54 26.47,21.26 29.67,24.46 29.67,26.75 28.61,27.81 J4.SH3 | 17.63,15.62 17.63,11.51 15.19,9.07 v15.19,5.41 15.5,5.11 v23.88,5.11 | J4.SH1 28.45,32.08 19.92,32.08 J4.SH2
  pour Route2: -2.71,19.07 -2.71,4.09 4.14,-2.77 42.12,-2.77 48.82,3.94 48.82,30.89 41.58,38.12 4.6,38.12 -2.71,30.81 -2.71,19 -2.76,18.95
JJ  (4 unrouted)
  Top 0.152: C10.1 23.42,23.85 23.42,24.46 C16.1
LX1  (2 unrouted)
LX2  (via drill 0.35)
  Top 0.152: 21.9,22.94 21.44,22.94 IC9.D2 | 21.9,22.94 22.36,22.94 v22.51,22.78 | v18.39,24.92 18.39,23.85 19,23.24 L7.2 | 21.9,22.94 IC9.D3
  Bottom 0.152: v22.51,22.78 20.53,22.78 v18.39,24.92
N$1  (1 unrouted)
N$2  (1 unrouted)
N$3
  Top 0.152: IC9.E1 20.98,22.48 20.53,22.94 20.53,23.39 R2.2
N$4  (via drill 0.35)
  Top 0.152: v10.62,27.97 10.62,28.73 IC3.1 | v13.21,29.18 13.21,29.49 13.67,29.95 R3.2
  Bottom 0.152: v10.62,27.97 11.99,27.97 v13.21,29.18
N$5  (1 unrouted)
N$6  (2 unrouted)
N$7  (2 unrouted)
N$8
  Top 0.152: U1.P$C1 27.69,19.74 27.23,20.19 26.62,20.19 26.47,20.04 26.47,19.74 C5.1
N$9
  Top 0.152: U1.P$N24 34.24,17.3 35.46,16.08 35.46,14.71 C9.1
N$10  (1 unrouted)
N$11
  Top 0.152: L3.1 35.46,19.13 36.38,20.04 L2.2
N$12
  Top 0.152: 35.16,17.91 35.31,17.75 C3.1 35.16,17.91 | 35.16,17.91 34.4,18.67 34.09,18.67 33.94,18.52 33.79,18.52 U1.P$H23 | 35.16,17.91 35.46,18.21 36.22,18.21 36.68,17.75 L1.1
N$13
  Top 0.152: C4.1 38.66,16.99 C22.1 | L1.2 C4.1 | C4.1 38.66,18.06 38.82,18.21 40.49,18.21 41.25,17.45 ANT1.1
N$14  (1 unrouted)
N$15  (2 unrouted)
N$16
  Top 0.152: U1.P$B24 34.24,20.35 34.24,20.8 33.79,21.26 31.04,21.26 30.13,22.17 X1.1 29.98,22.33 29.67,22.63 28.3,22.63 28.15,22.78 28.15,23.09 C1.1
N$17  (via drill 0.35)
  Top 0.152: Q3.3 14.13,19.74 14.58,20.19 15.04,20.19 L5.2 15.04,20.8 15.5,21.26 15.5,21.41 v15.8,21.72 | C2-EP-DR.2 21.29,19.13 21.29,18.97 20.98,18.67 20.07,18.67 19.92,18.82 D5.2 19.46,18.82 18.85,19.43 v18.09,19.43
  Bottom 0.152: v18.09,19.43 v15.8,21.72
N$18
  Top 0.152: C2-EP-DR.1 20.83,19.28 20.38,19.74 19.92,19.74 D4.2 19.77,19.89 18.55,19.89 17.78,20.65 16.41,20.65 D2.1
N$20  (via drill 0.35)
  Top 0.152: v16.26,17.45 15.04,18.67 14.28,18.67 R1_EP_DR.1 | v15.04,16.84 15.04,17.45 14.89,17.6 R_TYPE_SEL.2 | v29.06,24.76 30.74,24.76 31.65,25.68 31.65,25.98 SJ1.2
  Bottom 0.152: v15.04,16.84 15.65,17.45 v16.26,17.45 17.78,15.93 20.22,15.93 v29.06,24.76
N$22  (1 unrouted)
N$23
  Top 0.152: C32.2 4.53,4.5 5.29,4.5 5.59,4.8 5.9,4.8 6.36,4.34 IC2.A2
N$24  (via drill 0.35)
  Top 0.152: v9.4,21.41 9.71,21.72 10.32,21.72 J1.4 | v13.97,22.02 13.67,22.02 13.06,21.41 EPD_C2.2
  Bottom 0.152: v9.4,21.41 8.79,22.02 8.79,22.63 9.1,22.94 13.06,22.94 v13.97,22.02
N$25
  Top 0.152: J1.5 10.47,21.26 10.77,21.26 11.08,21.56 11.08,23.09 11.38,23.39 12.15,23.39 12.91,22.63 EPD_C1.2
N$28
  Top 0.152: J1.18 10.47,14.86 10.93,14.86 11.08,15.01 11.08,18.06 11.38,18.36 12.15,18.36 12.45,18.06 12.45,16.99 12.91,16.54 EPD_C6.2
N$29  (via drill 0.35)
  Top 0.152: v9.4,14.71 9.86,14.25 10.32,14.25 J1.19 | v13.97,15.47 13.06,15.47 EPD_C7.2
  Bottom 0.152: v9.4,14.71 13.21,14.71 v13.97,15.47
N$30  (via drill 0.35)
  Top 0.152: v9.4,13.79 10.32,13.79 J1.20 | v13.97,14.55 13.21,14.55 13.06,14.4 EPD_C8.2
  Bottom 0.152: v9.4,13.79 13.21,13.79 v13.97,14.55
N$31  (via drill 0.35)
  Top 0.152: v19,26.14 18.7,26.44 18.7,27.05 R1_USB.2 | v26.01,26.14 25.41,26.75 25.41,27.36 J4.A5
  Bottom 0.152: v19,26.14 19.46,26.14 20.98,24.61 24.49,24.61 v26.01,26.14
N$32  (via drill 0.35)
  Top 0.152: v11.38,11.05 11.08,11.35 11.08,12.42 10.77,12.73 10.47,12.73 J1.22 | v12.6,11.05 12.6,11.81 12.91,12.12 EPD_C10.2
  Bottom 0.152: v12.6,11.05 v11.38,11.05
N$33
  Top 0.152: C31.2 23.27,6.02 23.88,6.63 30.59,6.63 32.42,4.8 34.09,4.8 R8.1
N$34  (via drill 0.35)
  Top 0.152: v11.38,10.13 10.47,11.05 10.47,11.66 J1.24 | v15.35,10.13 16.72,11.51 16.72,12.73 16.26,13.18 EPD_C12.2
  Bottom 0.152: v15.35,10.13 v11.38,10.13
N$35
  Top 0.152: R2_USB.1 29.82,27.36 29.67,27.36 27.84,25.53 25.71,25.53 24.8,26.44 22.81,26.44 22.51,26.75 22.51,27.36 J4.B5
N$36  (via drill 0.35)
  Top 0.152: v12.08,6.71 12.24,6.55 12.24,6.07 C29.2 | v19.39,3.53 20.18,3.53 21.29,4.64 23.04,4.64 R7.1
  Bottom 0.152: v12.08,6.71 13.03,5.75 13.03,4.48 13.99,3.53 v19.39,3.53
OUT+
  Top 0.152: IC2.A3 6.81,4.34 6.81,4.5 4.37,6.93 TP_OP.TP
P0.13/1.5D  (via drill 0.35)
  Top 0.152: v34.85,5.56 34.4,6.02 C30.2 | v31.65,4.65 32.57,3.73 SW_UP.2 | v13.67,4.8 11.99,4.8 R5.1
  Bottom 0.152: v34.85,5.56 32.57,5.56 v31.65,4.65 31.2,4.19 15.04,4.19 14.43,4.8 v13.67,4.8
P1.01/1.6C
  Top 0.152: R_PWR_EPD.1 14.13,27.05 13.97,27.2 12.91,27.2 12.6,26.9 12.6,24.46 DMG2305UX-7.1
PMIC_INT  (1 unrouted)
PREVGH  (via drill 0.35)
  Top 0.152: v9.4,11.35 8.79,11.96 8.79,12.57 9.4,13.18 10.32,13.18 J1.21 | v13.82,11.35 13.82,12.57 13.36,13.03 | 13.36,13.03 13.06,13.33 EPD_C9.2 13.36,13.03 | 13.36,13.03 14.28,13.94 14.43,13.94 16.87,16.38 16.87,17.75 16.41,18.21 16.41,18.82 D5.1
  Bottom 0.152: v9.4,11.35 10.77,11.35 11.08,11.66 13.52,11.66 v13.82,11.35
PREVGL  (via drill 0.35)
  Top 0.152: v9.4,12.27 10.32,12.27 J1.23 | v15.5,11.2 15.5,11.51 16.11,12.12 | v18.7,20.65 19.77,20.65 D2.2 | v18.24,16.54 15.5,13.79 15.5,12.73 16.11,12.12 | 16.11,12.12 EPD_C11.2
  Bottom 0.152: v9.4,12.27 14.43,12.27 v15.5,11.2 | v18.7,20.65 18.7,16.99 v18.24,16.54
RESE  (via drill 0.35)
  Top 0.152: v14.13,17.45 14.28,17.6 R1_EP_DR.2 14.28,18.21 | v12.6,19.74 11.84,18.97 Q3.2 | v9.4,22.33 10.32,22.33 J1.3
  Bottom 0.152: v14.13,17.45 14.13,18.36 12.76,19.74 v12.6,19.74 10.01,22.33 v9.4,22.33
RESET  (2 unrouted)
SCL/1.4C
  Top 0.152: IC2.C1 5.75,3.28 4.53,3.28 2.7,5.11 2.7,7.7 4.37,9.37 7.57,9.37 8.64,10.44 8.64,11.66 8.49,11.81 8.49,23.24 13.52,28.27 15.19,28.27 18.24,31.32 18.7,31.32 19,31.62 19,32.38 18.7,32.69 18.39,32.69 U3.7
SCL/2.4C  (via drill 0.35)  (3 unrouted)
  Top 0.152: v10.01,31.17 10.01,29.64 10.32,29.34 10.47,29.34 IC3.12 | v43.08,9.22 43.08,8.61 43.24,8.46 43.24,8.31 43.54,8 | 43.54,8 42.02,6.48 42.02,5.87 TP_SCL.TP | 43.54,8 R17.2
  Bottom 0.152: v10.01,31.17 12.45,33.6 31.04,33.6 36.38,28.27 36.38,17.14 43.08,10.44 v43.08,9.22
SDA/1.4C  (1 unrouted)
SDA/2.4C  (via drill 0.35)
  Top 0.152: 20.22,25.07 IC1.C1 | 20.22,25.07 19.92,24.76 19.92,24.61 20.38,24.16 R2.1 | v27.08,17.75 27.69,17.75 U1.P$L1 | v40.8,9.37 41.86,8.31 TP_SDA.TP 41.86,8.15 40.64,6.93 40.64,5.26 41.41,4.5 42.47,4.5 43.39,5.41 43.85,5.41 R18.2 | v17.33,31.32 14.58,28.57 13.36,28.57 12.76,27.97 11.69,27.97 11.08,28.57 11.08,28.73 IC3.2 | 20.22,25.07 19.92,25.37 19.92,25.98 20.22,26.29 22.05,26.29 v22.2,26.14
  Bottom 0.152: v27.08,17.75 27.08,18.21 28.91,20.04 33.03,20.04 | 33.03,20.04 40.8,12.27 v40.8,9.37 | 18.24,32.23 19.31,33.3 30.89,33.3 35.01,29.18 35.01,22.02 33.03,20.04 | 18.24,32.23 v17.33,31.32 | v22.2,26.14 22.2,27.2 22.81,27.81 22.81,29.03 20.98,30.86 19.61,30.86 18.24,32.23
SWDCLK  (2 unrouted)
SWDIO  (2 unrouted)
SWO  (1 unrouted)
VBAT/1.2A  (via drill 0.35)  (1 unrouted)
  Top 0.152: v17.78,29.95 18.09,29.95 18.55,30.4 18.55,30.56 C27.2 | 16.26,32.38 v15.35,32.38 | 16.26,32.38 16.26,32.69 U3.2 | 16.26,32.38 U3.3
  Bottom 0.152: v15.35,32.38 v17.78,29.95
VBAT/2.5C  (1 unrouted)
VBUS/1.5D  (via drill 0.35)  (2 unrouted)
  Top 0.152: v30.13,29.34 30.28,29.49 30.28,30.1 C42.1 | 32.42,30.1 v31.65,29.34 | 32.42,30.1 32.11,30.4 32.11,31.93 32.72,32.54 33.03,32.54 D3.5 | 32.42,30.1 C43.1
  Bottom 0.152: v31.65,29.34 v30.13,29.34
VBUS/2.6D  (via drill 0.35)  (1 unrouted)
  Top 0.152: 27.69,11.35 27.54,11.2 26.47,11.2 25.86,11.81 C21.1 | 27.69,11.35 28.15,11.81 28.15,14.25 U1.P$AD2 | v16.57,25.98 17.02,25.53 17.02,25.37 C38.2 | 27.69,11.35 v28,11.05
  Bottom 0.152: v16.57,25.98 11.23,25.98 8.18,22.94 8.18,11.51 15.19,4.5 30.59,4.5 32.26,6.17 32.26,6.78 v28,11.05
VREG  (via drill 0.35)  (3 unrouted)
  Top 0.152: 21.44,24.16 21.14,24.16 IC9.A1 | 21.44,24.16 21.9,24.16 IC9.A3 | 21.44,24.16 IC9.A2 | v23.42,21.11 23.42,22.02 C39.1 | 22.81,15.01 v22.81,19.43 | 22.81,15.01 22.05,14.25 C24.2 | v38.51,13.03 40.8,10.74 41.86,10.74 TP_VREG.TP | 22.81,15.01 v22.97,14.86
  Bottom 0.152: v23.42,21.11 23.42,20.04 v22.81,19.43 | v38.51,13.03 24.8,13.03 v22.97,14.86